# Altium PCB Main.PcbDoc
Units mil, origin at the board's own origin, x right, y up, seen from the top; angles counter-clockwise.
Board outline 6000 x 4000 mil, 2 copper layers (Top Layer, Bottom Layer); 40 components, 28 nets, 174 pads, 0 vias.
Unrouted connection lines stored in the file: 89.
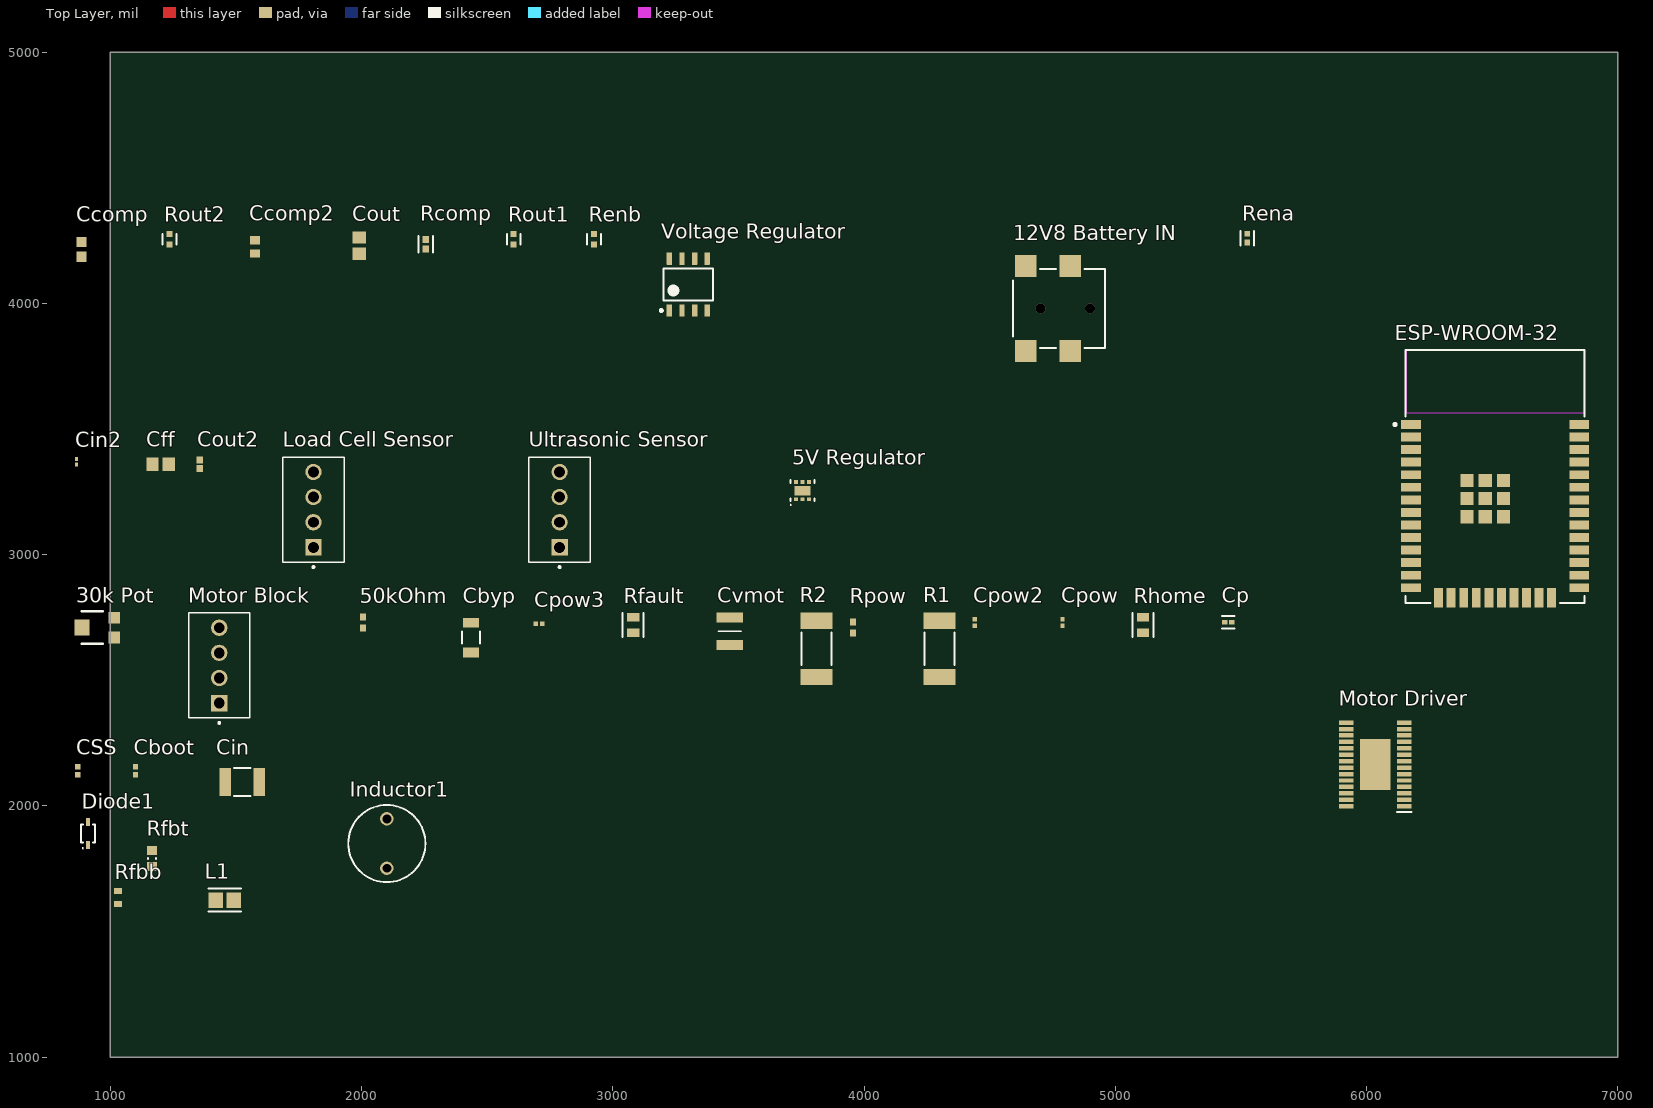
[diagram p0: Top Layer view]
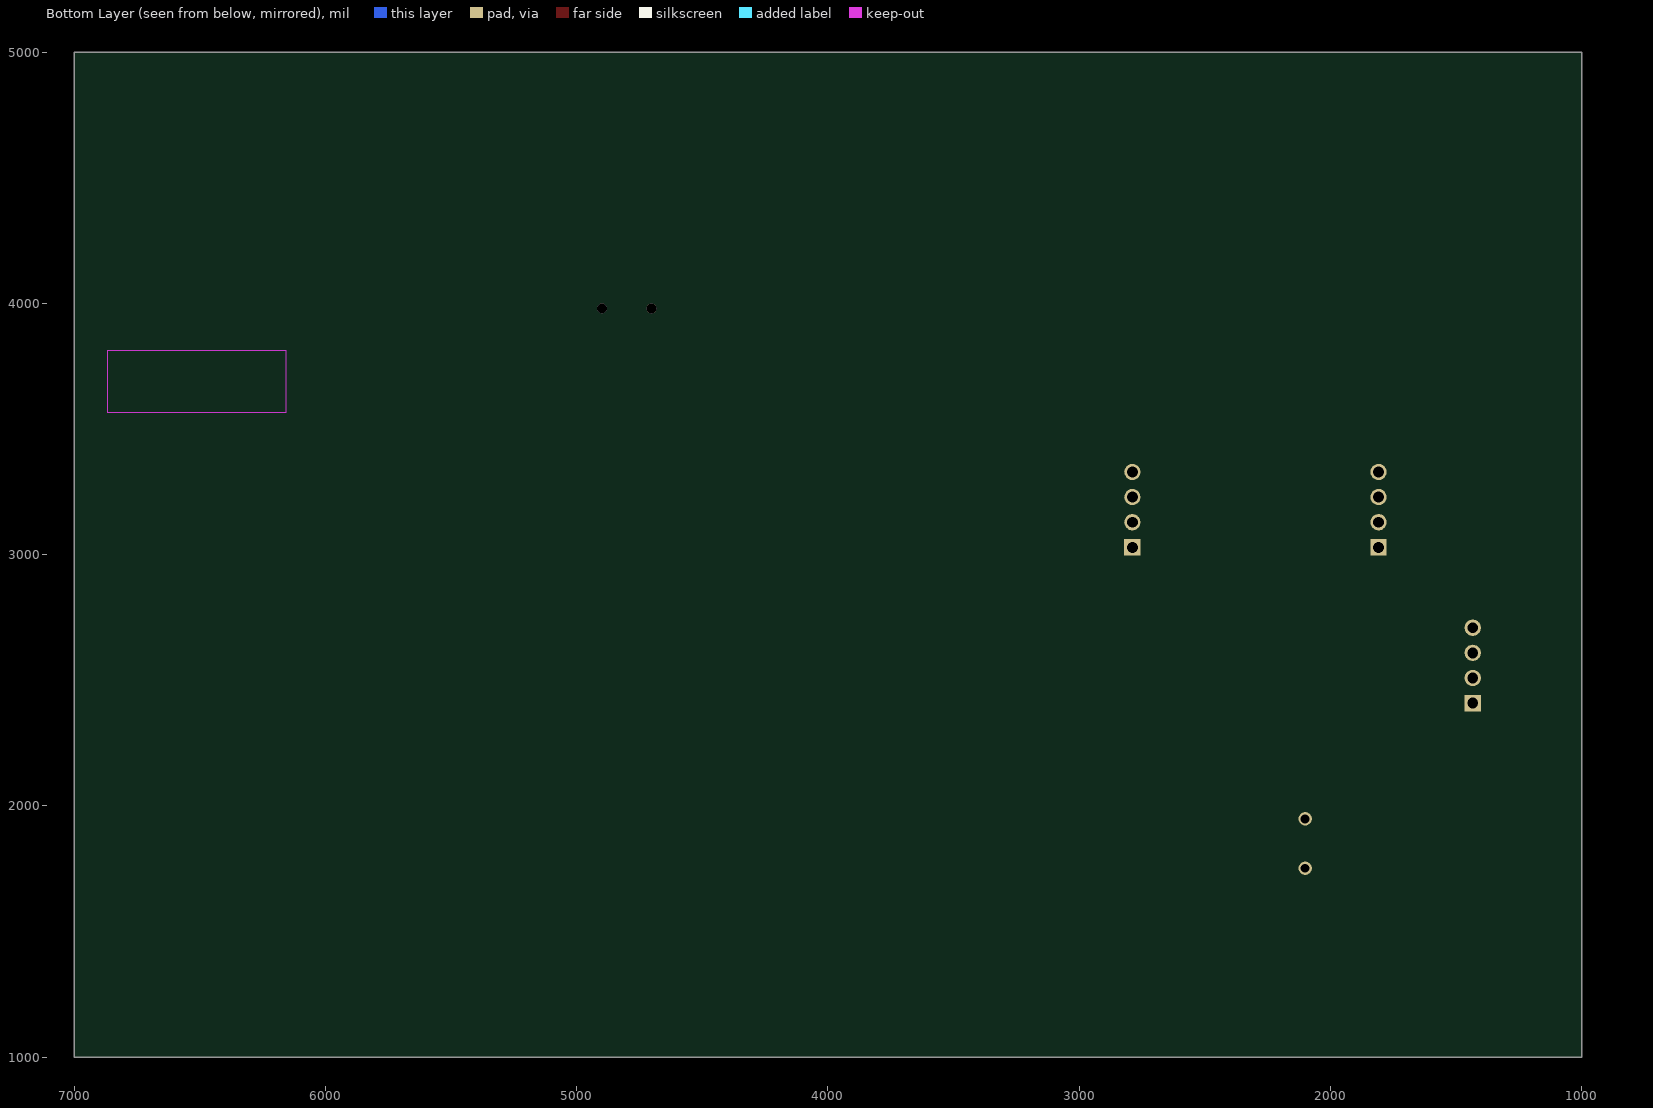
[diagram p1: Bottom Layer view, seen from below]

## Layer stack, top to bottom
Top Solder: solder mask 0.4, Solder Resist, Dk 3.5
Top Layer: signal copper 1.4
Dielectric 1: dielectric 12.6, FR-4, Dk 4.8
Bottom Layer: signal copper 1.4
Bottom Solder: solder mask 0.4, Solder Resist, Dk 3.5

## Board outline
1000,1000 7000,1000 7000,5000 1000,5000

## Design rules (kind name [scope] priority, off if disabled: settings)
Clearance [All] p1: gap=10 ignorepadtopadclearanceinfootprint=FALSE
PolygonConnect [All] p1: connectstyle=Relief reliefconductorwidth=10 reliefentries=4 polygonreliefangle="90 Angle" airgapwidth=10
RoutingVias [All] p1: holewidth=28 width=50 viastyle="Through Hole" minholewidth=28 minwidth=50 maxholewidth=28 maxwidth=50
SolderMaskExpansion [All] p1: expansion=4 istentingtop=FALSE
SupplyNets "Schematic Supply Nets" [InNet('GND')] p1: voltage=0.000
Width [All] p1: maxlimit=10 minlimit=10 preferedwidth=10
30 further rules are at their usual default settings.

## Classes and differential pairs
component class "Main Power": "12V8 Battery IN" Cboot Ccomp Ccomp2 Cin Cout CSS Diode1 Inductor1 Rcomp Rena Renb Rout1 Rout2 "Voltage Regulator"
component class "5V DC/DC": "5V Regulator" Cff Cin2 Cout2 L1 "Load Cell Sensor" Rfbb Rfbt "Ultrasonic Sensor"

## Components (designator, comment, footprint, x,y, rotation, side; value= is the part's Value field where it differs from the comment)
"5V Regulator" "TPS62122DRVR" PSON65P200X80_HS-7N 3755,3255 r90 top
"12V8 Battery IN" "694102107102" 694102107102 4775,3980 r90 top
"30k Pot" "" "SMD Pot" 1015,2670 r90 top
50kOhm "" RESC1005X40N 2005,2730 r90 top
Cboot "" CAPC1005X55X25LL05T10 1100,2140 r90 top
Cbyp "0.47uF" FP-1206-L_3_2_0_2-W_1_6_0-MFG 2435,2670 r90 top
Ccomp "6.8pF" Ccomp 885,4215 r90 top
Ccomp2 "6.8pF" Ccomp2 1575,4225 r90 top
Cff "15pF" CAP_0805 1200,3360 r0 top
Cin "" FP-GRM32-IPC_A 1525,2095 r0 top value=22uF
Cin2 "2.2uF" CAPC0402X02N 865,3370 r90 top
Cout "100uF" CAP_0805 1990,4230 r90 top
Cout2 "4.7uF" CAPC1005X06N 1355,3360 r90 top
Cp "0.01uF" FP-C0603-030-0_03-IPC_A 5450,2730 r0 top
Cpow "0.1uF" CAPC0603X33N 4790,2730 r90 top
Cpow2 "0.1uF" CAPC0603X33N 4440,2730 r90 top
Cpow3 "0.1uF" CAPC0603X33N 2705,2725 r180 top
CSS "" CAPC1005X55X25LL05T10 870,2140 r90 top
Cvmot "100uF" CAPC3225X279N 3465,2695 r90 top
Diode1 "0.54V" SODFL260X100-2N 910,1890 r90 top
ESP-WROOM-32 "ESP32-WROOM-32" FP-ESP32-WROOM-32-MFG 6511.61,3310.94 r0 top
Inductor1 "" WE-TI-L 2100,1850 r90 top
L1 "" FP-CB2012-IPC_A 1455,1625 r0 top
"Load Cell Sensor" "TerminalBlock" PHOENIX_1725672 1930,2970 r90 top
"Motor Block" "TerminalBlock" PHOENIX_1725672 1555,2350 r90 top
"Motor Driver" "DRV8825PWP" SOP65P640X120-29N 6035,2165 r180 top
R1 "200mOhm" WSL2512R2000FEA 4300,2625 r90 top
R2 "200mOhm" WSL2512R2000FEA 3810,2625 r90 top
Rcomp "18.7kΩ" FP-AC0402-IPC_A 2255,4235 r90 top
Rena "169kOhm" FP-CRCW0402-e3-IPC_B 5525,4260 r90 top
Renb "35.7kOhm" FP-CRCW0402-e3-MFG 2925,4255 r90 top
Rfault "10kOhm" FP-ESR10-IPC_C 3080,2720 r90 top
Rfbb "" RESC1608X55X25LL10T15 1030,1635.59 r90 top
Rfbt "" RESC0603(1608)_N 1165,1790 r90 top value="430000.00 Ohm"
Rhome "10kOhm" FP-ESR10-IPC_C 5110,2720 r90 top
Rout1 "10.2kOhm" FP-CRCW0402-e3-MFG 2605,4255 r90 top
Rout2 "3.24kOhm" FP-CRCW0402-e3-MFG 1235,4255 r90 top
Rpow "1MOhm" RESC1005X40N 3955,2710 r90 top
"Ultrasonic Sensor" "TerminalBlocks" PHOENIX_1725672 2910,2970 r90 top
"Voltage Regulator" "TPS54231DR" D0008A_L 3300,4075 r90 top

## Footprints (in the part's own frame and the unit in brackets; to place one, negate y for a bottom-side part, rotate by r counter-clockwise, add the part's x,y. Pads: shape width x height; smd on the part's side, far side on the other; paste and mask are expansions set on the pad)
694102107102 [mm] "DC Power Jack Right Angled Low Profile SMT ?3.9 with 4 soldering pads & pegs"
  rect 2.2x2.2 smd: 1(-4.3,-1.15) 1(-4.3,3.35) 2(4.3,-1.15) 3(4.3,3.35)
  round 1 hole 1 unplated: MH1(0,1.85) MH2(0,-3.15)
  silkscreen extent -4,-4.65 4,4.65, body extent -4.9,-4.65 4.9,4.65, height 5.32
CAP_0805 [mm] "Chip Capacitor, 2-Leads, Body 2.00x1.25mm, IPC Medium Density"
  rect 1.25x1.4 smd: 1(-0.825,0) 2(0.825,0)
  body extent -1.05,-0.67 1.05,0.67, height 1.35
CAPC0402X02N [mm] "Chip Capacitor, 2-Leads, Body 0.40x0.20mm, IPC Medium Density"
  rect 0.4x0.32 smd: 1(-0.27,0) 2(0.27,0)
  body extent -0.21,-0.11 0.21,0.11, height 0.22
CAPC0603X33N [mm]
  rect 0.46x0.42 smd: 1(-0.33,0) 2(0.33,0)
  body extent -0.3,-0.15 0.3,0.15, height 0.33
CAPC1005X06N [mm] "Chip Capacitor, 2-Leads, Body 1.00x0.50mm, IPC Medium Density"
  rect 0.74x0.68 smd: 1(-0.43,0) 2(0.43,0)
  body extent -0.58,-0.33 0.58,0.32, height 0.65
CAPC1005X55X25LL05T10 [mm] "Chip Capacitor, 2-Leads, Body 1.05x0.55mm, IPC High Density"
  rect 0.56x0.52 smd: 1(-0.39,0) 2(0.39,0)
  body extent -0.53,-0.28 0.53,0.28, height 0.55
CAPC3225X279N [mm]
  rect 1.02x2.72 smd: 1(-1.4,0) 2(1.4,0)
  silkscreen extent 0,-1.15 0,1.15, body extent -1.6,-1.25 1.6,1.25, height 2.79
Ccomp [mm]
  rect 1.05x1 smd: 1(-0.75,0) 2(0.75,0)
  body extent -0.88,-0.48 0.87,0.47, height 0.9
Ccomp2 [mm]
  rect 0.84x1.02 smd: 1(-0.67,0) 2(0.67,0)
  body extent -0.89,-0.51 0.88,0.5, height 0.91
D0008A_L [mm] "SOIC, 8-Leads, Body 5x4mm, Pitch 1.27mm, IPC High Density"
  rrect18% 1.25x0.55 smd: 1(-2.625,1.905) 2(-2.625,0.635) 3(-2.625,-0.635) 4(-2.625,-1.905) 5(2.625,-1.905) 6(2.625,-0.635) 7(2.625,0.635) 8(2.625,1.905)
  silkscreen extent -2.75,-2.5 1.6,2.85, body extent -3,-2.45 3,2.45, height 1.63
FP-1206-L_3_2_0_2-W_1_6_0-MFG [mm]
  rect 1x1.6 smd paste+0 mask+0: 1(-1.5,0) 2(1.5,0)
  silkscreen extent -0.63,-0.9 0.63,0.9, body extent -2.1,-1 2.1,1, height 0.25
FP-AC0402-IPC_A [mil]
  rect 28.16x26.48 smd paste+0 mask+0: 1(-18.84,0) 2(18.84,0)
  silkscreen extent -33,-29 33,29, body extent -41,-21 41,21, height 10
FP-C0603-030-0_03-IPC_A [mil]
  rect 21.9x18.22 smd paste+0 mask+0: 1(-13.91,0) 2(13.91,0)
  silkscreen extent -25,-25 25,25, body extent -33,-17 33,17, height 10
FP-CB2012-IPC_A [mil]
  rect 57.28x61.27 smd paste+0 mask+0: 1(-36.44,0) 2(36.44,0)
  silkscreen extent -65,-46 65,46, body extent -85,-50 85,50, height 10
FP-CRCW0402-e3-IPC_B [mil]
  rect 22.37x22.54 smd paste+0 mask+0: 1(-17.8,0) 2(17.8,0)
  silkscreen extent -29,-27 29,27, body extent -35,-17 35,17, height 10
FP-CRCW0402-e3-MFG [mm]
  rect 0.6x0.6 smd paste+0 mask+0: 1(-0.525,0) 2(0.525,0)
  silkscreen extent -0.53,-0.7 0.53,0.7, body extent -0.92,-0.4 0.92,0.4, height 0.25
FP-ESP32-WROOM-32-MFG [mm]
  rect 2x0.9 smd paste+0 mask+0: 1(-8.5,5.26) 2(-8.5,3.99) 3(-8.5,2.72) 4(-8.5,1.45) 5(-8.5,0.18) 6(-8.5,-1.09) 7(-8.5,-2.36) 8(-8.5,-3.63) 9(-8.5,-4.9) 10(-8.5,-6.17) 11(-8.5,-7.44) 12(-8.5,-8.71) 13(-8.5,-9.98) 14(-8.5,-11.25) 25(8.5,-11.25) 26(8.5,-9.98) 27(8.5,-8.71) 28(8.5,-7.44) 29(8.5,-6.17) 30(8.5,-4.9) 31(8.5,-3.63) 32(8.5,-2.36) 33(8.5,-1.09) 34(8.5,0.18) 35(8.5,1.45) 36(8.5,2.72) 37(8.5,3.99) 38(8.5,5.26)
  rect 0.9x2 smd paste+0 mask+0: 15(-5.715,-12.25) 16(-4.445,-12.25) 17(-3.175,-12.25) 18(-1.905,-12.25) 19(-0.635,-12.25) 20(0.635,-12.25) 21(1.905,-12.25) 22(3.175,-12.25) 23(4.445,-12.25) 24(5.715,-12.25)
  rect 1.33x1.33 smd paste+0 mask+0: 39(-2.835,-4.075) 39(-2.835,-2.24) 39(-2.835,-0.405) 39(-1,-4.075) 39(-1,-2.24) 39(-1,-0.405) 39(0.835,-4.075) 39(0.835,-2.24) 39(0.835,-0.405)
  Keep-Out Layer region: -9,6.45 9,6.45 9,12.75 -9,12.75
  Keep-Out Layer region: -9,6.45 9,6.45 9,12.75 -9,12.75
  silkscreen extent -10.25,-12.8 9.05,12.8, body extent -9.6,-13.35 9.6,12.9, height 0.25
FP-ESR10-IPC_C [mil]
  rect 33.79x49.69 smd paste+0 mask+0: 1(-30.59,0) 2(30.59,0)
  silkscreen extent -47,-42 47,42, body extent -51,-31 51,31, height 10
FP-GRM32-IPC_A [mm]
  rect 1.154x2.806 smd paste+0 mask+0: 1(-1.725,0) 2(1.725,0)
  silkscreen extent -0.85,-1.4 0.85,1.4, body extent -2.8,-1.9 2.8,1.9, height 0.25
PHOENIX_1725672 [mm]
  rect 1.65x1.65 / inner round 1.65 / far side rect 1.65x1.65 hole 1.1: 1(1.5,3.1)
  round 1.65 hole 1.1: 2(4.04,3.1) 3(6.58,3.1) 4(9.12,3.1)
  silkscreen extent -0.6,0 10.62,6.2, body extent -0.08,0 10.6,6.2, height 8.5
PSON65P200X80_HS-7N [mm] "PSON, 6-Leads, Body 2.00x2.00mm, Pitch 0.65mm, Thermal Pad 1.60x0.96mm, IPC Medium Density"
  rect 0.4x0.4 smd: 1(-0.88,0.65) 2(-0.88,0) 3(-0.88,-0.65) 4(0.88,-0.65) 5(0.88,0) 6(0.88,0.65)
  rect 0.96x1.6 smd: 7(0,0)
  silkscreen extent -1.5,-1.2 1.05,1.25, body extent -1.05,-1.05 1.05,1.05, height 0.8
RESC0603(1608)_N [mm] "Chip Resistor, Body 1.6x0.8mm, IPC Medium Density"
  rect 0.9x1 smd: 1(-0.8,0) 2(0.8,0)
  silkscreen extent -0.05,-0.4 0.05,0.4, body extent -0.85,-0.47 0.85,0.47, height 0.6
RESC1005X40N [mm]
  rect 0.7x0.6 smd: 1(-0.55,0) 2(0.55,0)
  body extent -0.5,-0.25 0.5,0.25, height 0.4
RESC1608X55X25LL10T15 [mm] "Chip Resistor, 2-Leads, Body 1.60x0.80mm, IPC High Density"
  rect 0.6x0.8 smd: 1(-0.65,0) 2(0.65,0)
  body extent -0.85,-0.45 0.85,0.45, height 0.55
"SMD Pot" [mm]
  rect 1.2x1.2 smd: 1(0,0) 2(2,0)
  rect 1.6x1.5 smd: 3(1,3.25)
  silkscreen extent -0.64,1.14 2.64,3.3, body extent -0.48,-0.22 2.52,3.58, height 1.19
SODFL260X100-2N [mm] "SODFL, 2-Leads, Body 1.30x2.60mm, IPC Medium Density"
  rect 0.8x0.4 smd: 1(-1.175,0) 2(1.175,0)
  silkscreen extent -1.52,-0.7 0.9,0.7, body extent -0.9,-0.7 0.9,0.7, height 1
SOP65P640X120-29N [mm]
  rect 1.475x0.45 smd: 1(-2.938,4.225) 2(-2.938,3.575) 3(-2.938,2.925) 4(-2.938,2.275) 5(-2.938,1.625) 6(-2.938,0.975) 7(-2.938,0.325) 8(-2.938,-0.325) 9(-2.938,-0.975) 10(-2.938,-1.625) 11(-2.938,-2.275) 12(-2.938,-2.925) 13(-2.938,-3.575) 14(-2.938,-4.225) 15(2.938,-4.225) 16(2.938,-3.575) 17(2.938,-2.925) 18(2.938,-2.275) 19(2.938,-1.625) 20(2.938,-0.975) 21(2.938,-0.325) 22(2.938,0.325) 23(2.938,0.975) 24(2.938,1.625) 25(2.938,2.275) 26(2.938,2.925) 27(2.938,3.575) 28(2.938,4.225)
  rect 3.1x5.18 smd: 29(0,0)
  silkscreen extent -3.67,4.8 -2.2,4.8, body extent -3.3,-4.9 3.3,4.9, height 1.7
WE-TI-L [mm] "THT Inductor, 2-Leads, Body 7.8 x 7.8 mm"
  round 1.35 hole 0.9: 1(-2.5,0) 2(2.5,0)
  silkscreen extent -3.9,-3.9 3.9,3.9, body extent -3.9,-3.9 3.89,3.9, height 9.5
WSL2512R2000FEA [mm]
  rect 1.65x3.25 smd: 1(-2.85,0) 2(2.85,0)
  silkscreen extent -1.65,-1.52 1.65,1.53, body extent -3.17,-1.59 3.17,1.59, height 0.64

## Part data
"5V Regulator": library part TPS6212
"12V8 Battery IN": library part CMP-1502-00174-2, Color=Black, Current Rating=5A, Flammability Rating="UL94 V-0", Insulation Resistance=100MΩ, Max Operating Temperature=85°C, Min Operating Temperature=-40°C, Operating Supply Voltage=18V, Connector Type=Power, Contact Gender=Female, Contact Plating=Tin, Gender=Male, Housing Material=Polyamide, Mount="Surface Mount", NexarPartId=52645180, Packaging="Tape and Reel", REACH SVHC=Unknown, RoHS=Compliant, Shielding=Unshielded, Termination=SMD/SMT, Voltage Rating=18V, Voltage Rating (DC)=18V
"30k Pot": library part 30kPot, "TC33X-2-303E Bourns"
50kOhm: library part 50kOhm, "CRCW040250K0FKED"
Cboot: library part Cboot, "GRM155R71A104KA01D", Capacitance=100000pF, Case Size/Dimension=0402, Dielectric=X7R, Manufacturer=Murata, Package Description="2-Pin Surface Mount Device, Body 1 x 0.5 mm", Rated Voltage=10V, Tolerance (%)=±10%, Datasheet URL=http://search.murata.co.jp/Ceramy/image/img/A01X/G101/ENG/GRM155R71A104KA01-01.pdf, Datasheet Version=02/2016, Manufacturer URL=http://www.murata.com/, Mounting Technology=SurfaceMount, Package Reference=0402
Cbyp: library part CMP-04427-014563-1, "12065C474K4Z2A", Capacitance=470nF, Case Code (Imperial)=1206, Case Code (Metric)=3216, Dielectric=X7R, Max Operating Temperature=125°C, Min Operating Temperature=-55°C, Ratings=AEC-Q200, Tolerance=10%, Voltage Rating=50V, Case/Package=1206, Depth=1.6mm, Features="Soft Termination", Length=0.126inch, Mount="Surface Mount", Packaging="Tape and Reel", Radiation Hardening=No, RoHS Compliant=Yes, Series=FLEXITERM®, Thickness=0.06inch, Voltage Rating (DC)=50V, Width=0.063inch
Ccomp: library part Ccomp, "06031U6R8BAT2A"
Ccomp2: library part Ccomp2, "06031U6R8BAT2A"
Cff: library part Cff, "CC0805JRNPO9BN150"
Cin: library part Cin, "GRM32ER61E226KE15L", Capacitance=22uF, Manufacturer="Murata Electronics North America", Operating Temperature="-55°C ~ 85°C", Package=GRM32, Package / Case="1210 (3225 Metric)", Standard Package=1,000, Temperature="-55°C to +85°C", Temperature Characteristic=X5R, Temperature Range High=+85°C, Temperature Range Low=-55°C, Tolerance=10%, Voltage - Rated=25V, Applications="General Purpose", Automotive=No, Category=Cap, ComponentLink2Description=Datasheet, ComponentLink2URL=https://search.murata.co.jp/Ceramy/image/img/A01X/G101/ENG/GRM32ER61E226KE15-01A.pdf, Device Class L1="Passive Components", Device Class L2=Capacitors, Device Class L3="Ceramic Capacitors", Digikey Description="CAP CER 22UF 25V X5R 1210", Height=2.7mm, Lead Free=Yes, Manufacturer Part Number=GRM32ER61E226KE15L, Material=Ceramic, Mounting Type="Surface Mount, MLCC", Mouser Description="Multilayer Ceramic Capacitors MLCC - SMD/SMT 1210 22uF 25volts X5R 10%", Octopart=https://octopart.com/grm32er61e226ke15l-murata-197441, Other Names=490-3889-2, Packaging="Cut Tape (CT)", Possible Substitute=GRM32ER61E226KE15K, RoHS=TRUE, Size / Dimension="0.126\" L x 0.098\" W (3.20mm x 2.50mm)", Temperature Coefficient=X5R, Thickness (Max)="0.106\" (2.70mm)", Voltage Rating=25V
Cin2: library part Cin2, "C1005X5R1V225K050BC"
Cout: library part CAP_0805, "Capacitor SMD 0805 Generic"
Cout2: library part Cout2, "GRM155R61A475MEAAD"
Cp: "C0603X5R1C103M030BA", Capacitance=10nF, Case Code (Imperial)=0201, Case Code (Metric)=0603, Dielectric=X5R, Dielectric Material=Ceramic, Max Operating Temperature=85°C, Min Operating Temperature=-55°C, Package Quantity=15000, Tolerance=20%, Voltage Rating=16V, Case/Package=0201, Height=0.3mm, Lead Free="Lead Free", Length=0.024inch, Mount="Surface Mount", Packaging="Tape and Reel", RoHS Compliant=Yes, Termination=SMD/SMT, Thickness=0.013inch, Voltage Rating (DC)=16V, Weight=6E-06oz, Width=0.012inch
Cpow Cpow2 Cpow3: "GRM033C71C104KE14J", Manufacturer_Name="Murata Electronics", Mouser Part Number=81-GRM033C71C104KE4J, Datasheet Link=http://www.murata.com/~/media/webrenewal/support/library/catalog/products/capacitor/mlcc/c02e.pdf, Geometry.Height=0.33mm, Manufacturer_Part_Number=GRM033C71C104KE14J, Mouser Price/Stock=https://www.mouser.co.uk/ProductDetail/Murata-Electronics/GRM033C71C104KE14J?qs=QzBtWTOodeU72T%252BpeIULSA%3D%3D
CSS: library part CSS, "GRM155R71C822KA01D", Manufacturer=Murata, Part Number=GRM155R71C822KA01D
Cvmot: "1210YD107MAT2A"
Diode1: library part Schottky
ESP-WROOM-32: library part CMP-194065-000008-1, "RX TXRX MOD WIFI SURFACE MOUNT", Case/Package=SMD/SMT, Frequency=2.5GHz, Max Operating Temperature=85°C, Min Operating Temperature=-40°C, Operating Supply Voltage=3.6V, Package Quantity=550, Data Rate=150Mbps, Mount="Surface Mount", Packaging="Cut Tape", Sensitivity=-98dBm, Weight=0.088185oz
Inductor1: library part PAS-IND-INDUCTOR-2, "744772390", Inductance="39.0 ÂµH", ComponentLink1Description="Manufacturer Link", ComponentLink1URL=http://www.we-online.com, ComponentLink2Description=Datasheet, ComponentLink2URL=http://www.we-online.de/katalog/media/pdf/744772390.pdf, DatasheetVersion="ver 8, Oct-2009", PackageDescription="THT Inductor, 2-Leads, Body 7.8 x 7.8 mm", PackageReference=WE-TI-L, PackageVersion=2006
L1: library part L1, "CBC2012T220M", Case Code (Imperial)=0805, Case Code (Metric)=2012, Current Rating=190mA, DC Resistance (DCR)=4.81R, Inductance=22uH, Max DC Current=170mA, Max Operating Temperature=105°C, Min Operating Temperature=-40°C, Package Quantity=3000, Resistor Type=Wirewound, Self Resonant Frequency=16MHz, Test Frequency=2.52MHz, Tolerance=20%, Case/Package=0805, Core Material=Ferrite, Halogen Free="Halogen Free", Height=1.25mm, Height - Seated (Max)=0.057inch, Lead Free=Exempt, Length=0.079inch, Mount="Surface Mount", Number of Pins=2, Packaging="Tape and Reel", RoHS Compliant=Yes, Saturation Current=170mA, Series=CB, Shielding=Unshielded, Termination=SMD/SMT, Width=0.049inch
"Motor Driver": "2.5A Stepper Motor Driver HTSSOP28 Texas Instruments DRV8825PWP, Stepper Motor Driver, 28-Pin HTSSOP", Manufacturer_Name="Texas Instruments", Mouser Part Number=595-DRV8825PWP, Datasheet Link=http://www.ti.com/lit/ds/symlink/drv8825.pdf, Geometry.Height=1.2mm, Manufacturer_Part_Number=DRV8825PWP, Mouser Price/Stock=https://www.mouser.co.uk/ProductDetail/Texas-Instruments/DRV8825PWP?qs=L4ss%2FyqpMWT%252BKNufX9tf3Q%3D%3D
R1 R2: "WSL2512R2000FEA"
Rcomp: library part CMP-03412-024020-2, "AC0402FR-0718K7L", Case/Package=0402, Max Operating Temperature=155°C, Max Power Dissipation=63mW, Min Operating Temperature=-55°C, Resistance=18.7kR, Resistor Type="Thick Film", Temperature Coefficient=100ppm/°C, Tolerance=1%, Features="Moisture Resistant", Height=0.015inch, Length=0.039inch, Number of Terminations=2, Packaging="Tape and Reel", RoHS Compliant=Yes, Series=AC, Width=0.02inch
Rena: library part CMP-2002-08234-2, "CRCW0402169KFKED", Case Code (Imperial)=0402, Case Code (Metric)=1005, Max Operating Temperature=155°C, Max Power Dissipation=63mW, Min Operating Temperature=-55°C, Package Quantity=10, Resistance=169kR, Temperature Coefficient=100ppm/°C, Tolerance=1%, Voltage Rating=50V, Case/Package=0402, Composition="Thick Film", Contact Plating=Tin, Depth=0.5mm, Features="Automotive AEC-Q200", Height=0.35mm, Lead Free="Lead Free", Length=1mm, Military Standard=Not, Mount="Surface Mount", Number of Pins=2, Number of Terminations=2, Packaging="Tape and Reel", Power Rating=63mW, Radiation Hardening=No, Termination=SMD/SMT, Voltage Rating (DC)=50V, Weight=2.3E-05oz, Width=0.02inch
Renb: library part CMP-2002-08543-2, "CRCW040235K7FKED", Case Code (Imperial)=0402, Case Code (Metric)=1005, Max Operating Temperature=155°C, Max Power Dissipation=63mW, Min Operating Temperature=-55°C, Package Quantity=10, Resistance=35.7kR, Temperature Coefficient=100ppm/°C, Tolerance=1%, Voltage Rating=50V, Case/Package=0402, Composition="Thick Film", Contact Plating=Tin, Depth=0.5mm, Features="Automotive AEC-Q200", Height=0.35mm, Lead Free="Lead Free", Length=1mm, Military Standard=Not, Number of Pins=2, Number of Terminations=2, Packaging="Tape and Reel", Power Rating=63mW, Radiation Hardening=No, Termination=SMD/SMT, Voltage Rating (DC)=50V, Weight=2.3E-05oz, Width=0.02inch, Working Voltage=50V
Rfault Rhome: library part CMP-08839-028179-1, "ESR10EZPD1002", RoHS Compliant=Yes
Rfbb: library part RES-2, "RC0603FR-0782KL", Case Code - in=0603, Case Code - mm=1608, Manufacturer=Yageo, Operating Temperature Range=-55Cto+155C, Package / Case=0603(1608metric), Package Description="2-Pin Surface Mount Device, Body 1.6 x 0.8 mm", Power Rating=100mW, Resistance=82kOhms, Temperature Coefficient=100PPM/C, Tolerance=1%, Voltage Rating=75V, Brand=Yageo, Datasheet URL=http://www.yageo.com/documents/recent/PYu-RC_Group_51_RoHS_L_7.pdf, Datasheet Version="Rev. 7, 05/2017", Height=0.45mm, Length=1.6mm, Manufacturer URL=http://www.yageo.com/, Mounting Technology=SurfaceMount, Package Reference=0603, Packaging=Reel, Product=ThickFilmResistorsGeneralPurpose, Product Category=ThickFilmResistors, RoHS=True, Series=RC, Termination Style=SMD/SMT, Type=GeneralPurposeChipResistorSurfaceMount, Unit Weight=0.000071oz, Width=0.8mm
Rfbt: library part RES, "RC0603FR-07430KL", Case-EIA=0603, Case-Metric=1608, Power="0.1 W", Tolerance="1 %", Technology=SMT
Rout1: library part CMP-2002-08138-2, "CRCW040210K2FKED", Case Code (Imperial)=0402, Case Code (Metric)=1005, Max Operating Temperature=155°C, Max Power Dissipation=63mW, Min Operating Temperature=-55°C, Package Quantity=10, Resistance=10.2kR, Temperature Coefficient=100ppm/°C, Tolerance=1%, Voltage Rating=50V, Case/Package=0402, Composition="Thick Film", Contact Plating=Tin, Depth=0.5mm, Features="Automotive AEC-Q200", Height=0.35mm, Length=1mm, Military Standard=Not, Mount="Surface Mount", Number of Pins=2, Number of Terminations=2, Packaging="Tape and Reel", Power Rating=63mW, Radiation Hardening=No, Termination=SMD/SMT, Weight=2.3E-05oz, Width=0.5mm
Rout2: library part CMP-2002-08579-2, "CRCW04023K24FKED", Case Code (Imperial)=0402, Case Code (Metric)=1005, Max Operating Temperature=155°C, Max Power Dissipation=63mW, Min Operating Temperature=-55°C, Package Quantity=10, Resistance=3.24kR, Temperature Coefficient=100ppm/°C, Tolerance=1%, Voltage Rating=50V, Case/Package=0402, Composition="Thick Film", Contact Plating=Tin, Depth=0.5mm, Features="Automotive AEC-Q200", Height=0.35mm, Lead Free="Lead Free", Length=1mm, Military Standard=Not, Mount="Surface Mount", Number of Pins=2, Number of Terminations=2, Packaging="Tape and Reel", Power Rating=63mW, Radiation Hardening=No, Termination=SMD/SMT, Voltage Rating (DC)=50V, Weight=2.3E-05oz, Width=0.5mm
Rpow: "CRCW04021M00FKEDHP"
"Ultrasonic Sensor": library part TerminalBlock
"Voltage Regulator": library part CMP-0323-00207-3, "Buck Step Down Regulator with 3.5 to 28 V Input and 0.8 to 25 V Output, -40 to 150 degC, 8-Pin SOIC (D), Green (RoHS & no Sb/Br)", Manufacturer="Texas Instruments", Rating=Catalog, Switch Current Limit(Typ)(A)=2.3, Code_JEDEC=MS-012AA, ComponentLink1Description=Datasheet, ComponentLink1URL=http://www.ti.com/general/docs/lit/getliterature.tsp?genericPartNumber=TPS54231&fileType=pdf, ComponentLink2Description="Package Specification", ComponentLink2URL=http://www.ti.com/litv/pdf/msoi002j, ComponentLink3Description="URL Link1", ComponentLink3URL="Samples URL:http://www.ti.com/product/tps54231#samples", DatasheetVersion=SLUS851C, Duty Cycle(Max)(%)=90, Eco-Plan="Green (RoHS & no Sb/Br)", Iout(Max)(A)=2, Iq(Typ)(mA)=0.11, Mounting Technology="Surface Mount", PackageDescription="8-Pin Plastic Small Outline Integrated Circuit, 4.9 x 3.9 mm, Pitch 1.27 mm Pitch", PackageReference=D0008A, PackageVersion="revM, Jun-2011", PartNumber=TPS54231DR, Regulated Outputs(#)=1, SubFamily="Step-Down Regulator", Topology=Buck, Vin(Max)(V)=28, Vin(Min)(V)=3.5, Vout(Max)(V)=25, Vout(Min)(V)=0.8

## Nets (pads, with @x,y where several pads share a name; then routed paths per layer and width w, separated by ;. In a path a pad name is that pad's centre, name@x,y a point inside that pad or via, vN(x,y) a via of type N, cw(c..) or ccw(c..) an arc to the next point about the centre after c; other vN are vias at no path point)
GND: "5V Regulator.3" "12V8 Battery IN.2" "12V8 Battery IN.3" "30k Pot.2" "Load Cell Sensor.2" "Motor Driver.14" "Motor Driver.28" "Motor Driver.29" "Ultrasonic Sensor.2" "Voltage Regulator.7" Cbyp.2 Ccomp2.1 Ccomp.2 Cin2.1 Cin.1 Cout2.1 Cout.2 Cpow2.1 Cpow3.1 CSS.2 Cvmot.1 Diode1.2 R1.2 R2.2 Renb.2 Rfbb.2 Rout2.2
"Net5V Regulator_1": "5V Regulator.1" "5V Regulator.2" "12V8 Battery IN.1" "Motor Driver.4" "Motor Driver.11" "Voltage Regulator.2" Cin2.2 Cin.2 Cpow2.2 Cpow3.2 Cpow.1 Cvmot.2 Rena.1 Rpow.1
"Net5V Regulator_4": "5V Regulator.4" Cff.1 Rfbb.1 Rfbt.2
"Net5V Regulator_5": "5V Regulator.5" "Load Cell Sensor.1" "Ultrasonic Sensor.1" Cff.2 Cout2.2 L1.2 Rfbt.1
"Net5V Regulator_6": "5V Regulator.6" L1.1
"Net30k Pot_1": 50kOhm.2 "30k Pot.1" "30k Pot.3" "Motor Driver.12" "Motor Driver.13"
Net50kOhm_1: 50kOhm.1 "Motor Driver.15" Cbyp.1 Rfault.1 Rhome.1
NetCboot_1: "Voltage Regulator.1" Cboot.1
NetCboot_2: "Voltage Regulator.8" Cboot.2 Diode1.1 Inductor1.1
NetCcomp2_2: "Voltage Regulator.6" Ccomp2.2 Rcomp.2
NetCcomp_1: Ccomp.1 Rcomp.1
NetCout_1: "Motor Driver.16" "Motor Driver.17" Cout.1 ESP-WROOM-32.3 Inductor1.2 Rout1.1
NetCp_1: "Motor Driver.1" Cp.1
NetCp_2: "Motor Driver.2" Cp.2
NetCpow_2: "Motor Driver.3" Cpow.2 Rpow.2
NetCSS_1: "Voltage Regulator.4" CSS.1
NetESP-WROOM-32_24: "Motor Driver.22" ESP-WROOM-32.24
NetESP-WROOM-32_25: "Motor Driver.20" ESP-WROOM-32.25
"NetMotor Block_1": "Motor Block.1" "Motor Driver.5"
"NetMotor Block_2": "Motor Block.2" "Motor Driver.7"
"NetMotor Block_3": "Motor Block.3" "Motor Driver.8"
"NetMotor Block_4": "Motor Block.4" "Motor Driver.10"
"NetMotor Driver_6": "Motor Driver.6" R1.1
"NetMotor Driver_9": "Motor Driver.9" R2.1
"NetMotor Driver_18": "Motor Driver.18" Rfault.2
"NetMotor Driver_27": "Motor Driver.27" Rhome.2
NetRena_2: "Voltage Regulator.3" Rena.2 Renb.1
NetRout1_2: "Voltage Regulator.5" Rout1.2 Rout2.1
pads on no net: "5V Regulator.7" "12V8 Battery IN.MH1" "12V8 Battery IN.MH2" "Load Cell Sensor.3" "Load Cell Sensor.4" "Motor Driver.19" "Motor Driver.21" "Motor Driver.23" "Motor Driver.24" "Motor Driver.25" "Motor Driver.26" "Ultrasonic Sensor.3" "Ultrasonic Sensor.4" ESP-WROOM-32.1 ESP-WROOM-32.2 ESP-WROOM-32.4 ESP-WROOM-32.5 ESP-WROOM-32.6 ESP-WROOM-32.7 ESP-WROOM-32.8 ESP-WROOM-32.9 ESP-WROOM-32.10 ESP-WROOM-32.11 ESP-WROOM-32.12 ESP-WROOM-32.13 ESP-WROOM-32.14 ESP-WROOM-32.15 ESP-WROOM-32.16 ESP-WROOM-32.17 ESP-WROOM-32.18 ESP-WROOM-32.19 ESP-WROOM-32.20 ESP-WROOM-32.21 ESP-WROOM-32.22 ESP-WROOM-32.23 ESP-WROOM-32.26 ESP-WROOM-32.27 ESP-WROOM-32.28 ESP-WROOM-32.29 ESP-WROOM-32.30 ESP-WROOM-32.31 ESP-WROOM-32.32 ESP-WROOM-32.33 ESP-WROOM-32.34 ESP-WROOM-32.35 ESP-WROOM-32.36 ESP-WROOM-32.37 ESP-WROOM-32.38 ESP-WROOM-32.39